# EAGLE board HackmodWear_workingcopy3 (EAGLE 9.1.0)
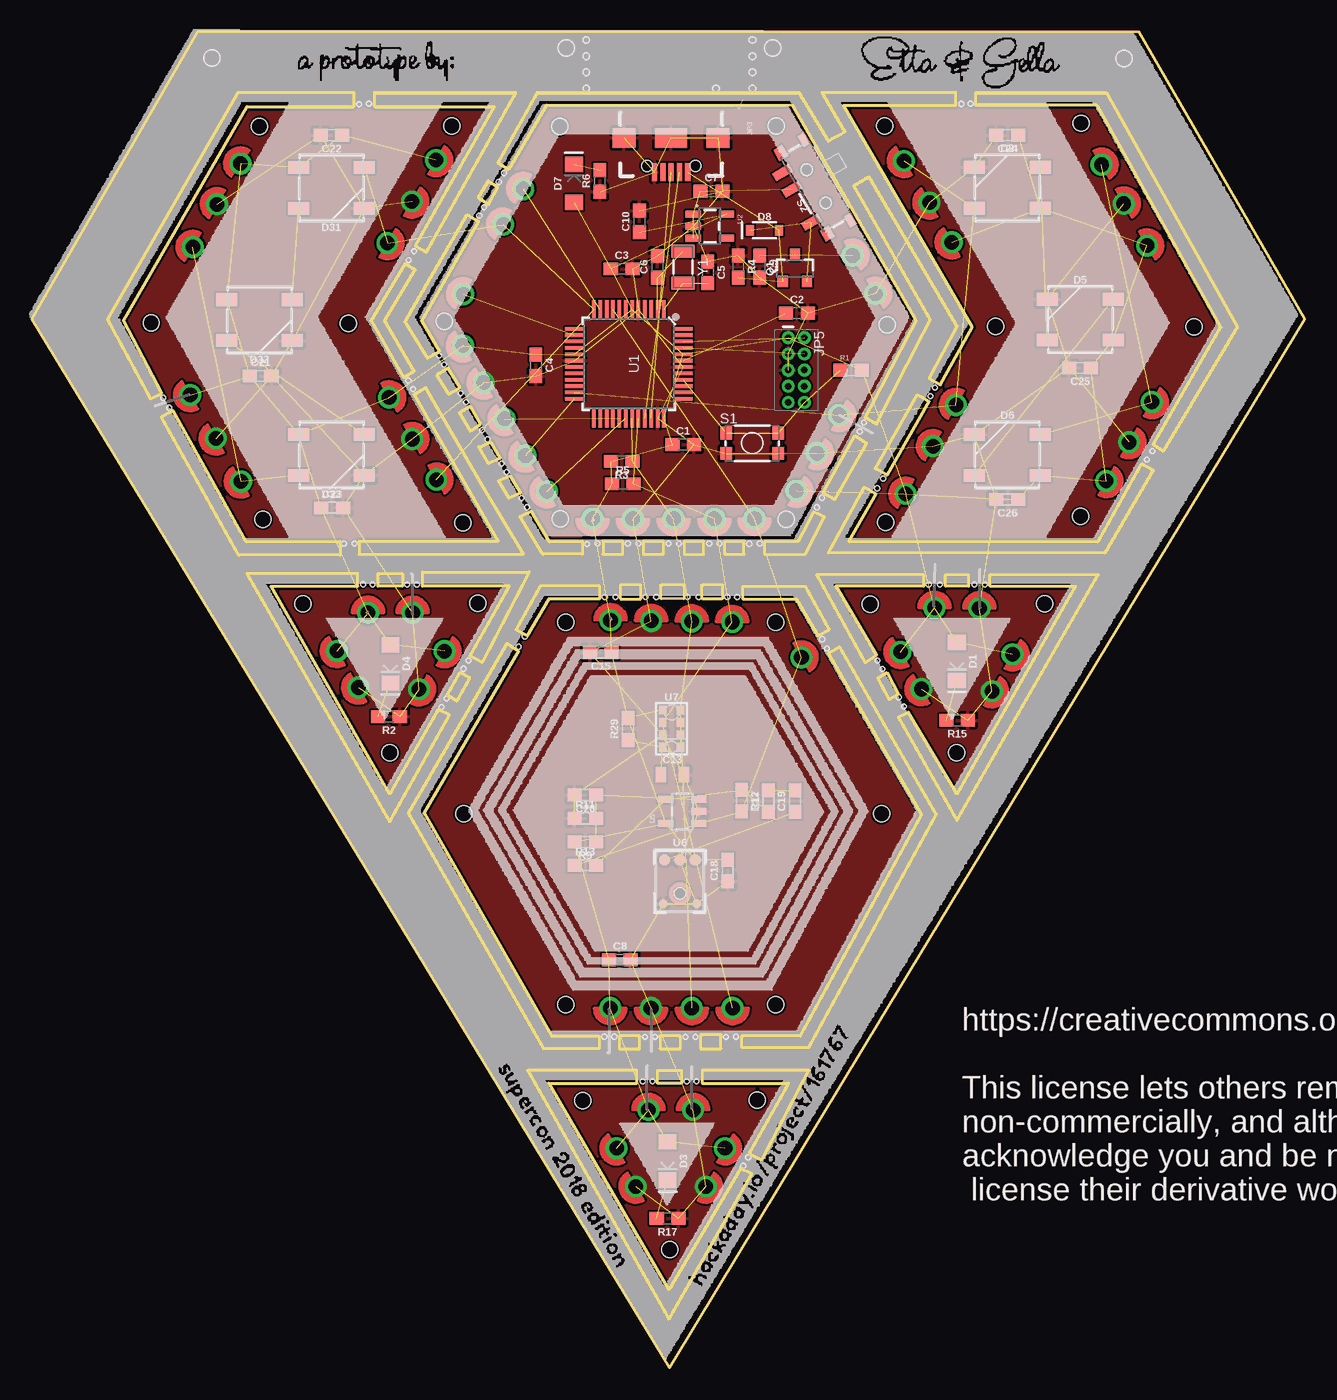
[diagram p0: board, top side]
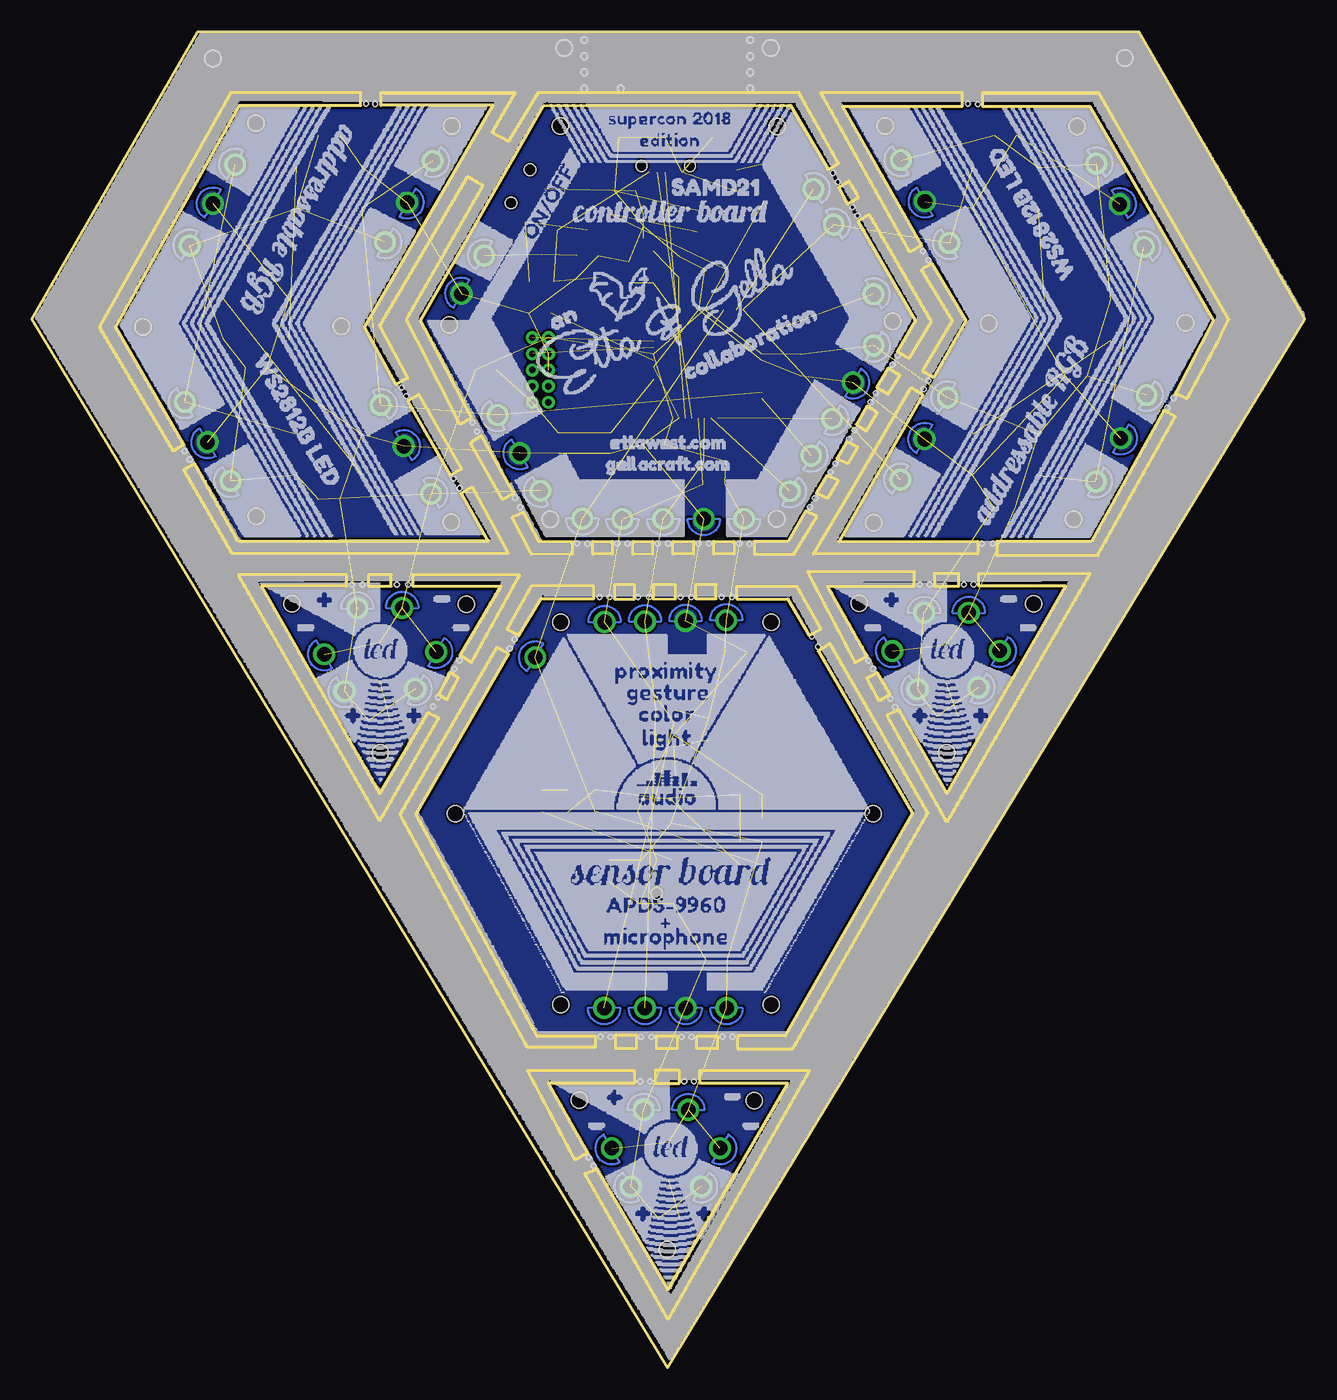
[diagram p1: board, bottom side, seen from below]

Size 99.85 x 104.77 mm. Coordinates in mm from the lower left corner, seen from the top.
Outline: 13.02,104.78 86.84,104.78 99.85,82.23 50.01,0 0,82.23 13.02,104.78
Outline: 16.86,98.91 25.26,98.91 25.26,100.01 16.16,100.01 5.96,82.21 6.17,81.81 6.61,80.96 9.27,76.01 10.17,76.41 7.17,82.11 16.86,98.91
Outline: 26.86,98.91 26.86,100.01 37.97,100.01 30.96,87.51 30.06,88.01 36.27,98.91 26.86,98.91
Outline: 29.26,86.61 30.06,86.11 27.66,82.11 29.98,78.17 29.15,77.67 26.6,82.11 29.26,86.61
Outline: 29.96,76.31 30.89,76.86 35.59,68.76 38.57,63.81 25.66,63.81 25.66,64.81 36.57,64.81 29.96,76.31
Outline: 24.16,64.81 24.16,63.73 16.23,63.73 10.14,74.59 11.06,75.09 16.76,64.81 24.16,64.81
Outline: 37.38,93.97 36.58,94.47 39.66,100.01 60.16,100.01 62.47,96.21 63.77,96.91 61.97,100.01 72.46,100.01 72.46,99.01 63.66,99.01 73.77,81.61 71.27,77.11 70.36,77.61 72.56,81.71 65.66,93.41 64.46,92.71 70.46,82.21 66.27,74.01 65.36,74.51 69.36,82.11 59.71,98.99 40.37,99.01 37.38,93.97
Outline: 35.84,91.26 36.57,92.59 35.77,93.08 35.02,91.79 35.84,91.26
Outline: 35.05,89.93 30.56,82.11 31.96,79.71 31.26,79.31 31.04,79.18 29.29,82.05 34.16,90.43 35.05,89.93
Outline: 32.66,78.41 31.76,77.84 32.7,76.36 33.58,76.89 32.66,78.41
Outline: 34.37,75.41 35.19,73.98 34.41,73.46 33.54,74.91 34.37,75.41
Outline: 35.97,72.61 36.72,71.32 35.82,70.92 35.07,72.21 35.97,72.61
Outline: 37.5,69.97 38.32,68.6 37.41,68.2 36.59,69.57 37.5,69.97
Outline: 39.16,67.2 40.57,64.81 43.18,64.81 43.18,63.81 40.07,63.81 38.27,66.77 39.16,67.2
Outline: 44.79,64.81 44.79,63.81 46.36,63.81 46.36,64.81 44.79,64.81
Outline: 47.95,64.81 47.95,63.81 49.55,63.81 49.55,64.81 47.95,64.81
Outline: 51.16,64.81 51.16,63.81 52.7,63.8 52.7,64.8 51.16,64.81
Outline: 54.34,64.81 54.34,63.81 55.88,63.81 55.88,64.81 54.34,64.81
Outline: 57.47,64.79 57.47,63.79 60.66,63.81 62.18,66.73 61.32,67.13 60.11,64.81 57.47,64.79
Outline: 62.07,68.61 64.56,73.11 65.46,72.51 62.97,68.11 62.07,68.61
Outline: 70.36,75.81 67.06,70.01 66.16,70.51 69.46,76.31 70.36,75.81
Outline: 66.19,68.56 64.06,64.81 83.66,64.81 87.06,70.91 87.96,70.41 84.16,63.91 62.47,63.91 65.3,69.06 66.19,68.56
Outline: 87.96,72.41 88.77,71.91 94.56,81.61 84.27,100.01 74.06,100.01 74.06,99.01 83.56,99.01 93.27,81.61 87.96,72.41
Outline: 44.57,60.31 40.57,60.31 38.87,57.41 37.97,57.91 39.87,61.31 44.57,61.31 44.57,60.31
Outline: 46.19,60.31 47.77,60.31 47.77,61.41 46.19,61.41 46.19,60.31
Outline: 49.37,60.31 49.37,61.41 51.15,61.42 51.15,60.32 49.37,60.31
Outline: 52.57,60.31 52.57,61.41 54.16,61.41 54.16,60.31 52.57,60.31
Outline: 55.77,60.31 55.77,61.31 60.66,61.31 62.57,57.91 61.66,57.41 59.97,60.31 55.77,60.31
Outline: 25.56,61.31 25.56,62.31 16.86,62.31 28.06,42.81 32.77,51.21 31.86,51.61 28.06,45.01 18.76,61.31 25.56,61.31
Outline: 33.57,54.51 32.57,52.81 33.37,52.31 34.37,54.11 33.57,54.51
Outline: 27.15,61.3 27.15,62.3 29.06,62.31 29.06,61.31 27.15,61.3
Outline: 30.63,61.31 30.64,62.41 39.01,62.41 35.3,55.31 34.37,55.81 37.47,61.31 30.63,61.31
Outline: 62.47,56.01 69.77,43.41 60.27,26.01 55.66,26.01 55.66,25.11 60.97,25.11 70.96,43.41 63.37,56.51 62.47,56.01
Outline: 67.06,54.51 67.96,52.81 67.27,52.41 66.36,54.11 67.06,54.51
Outline: 71.66,61.31 71.66,62.21 73.46,62.21 73.46,61.31 71.66,61.31
Outline: 75.16,61.31 75.16,62.21 83.66,62.21 72.56,42.91 67.96,51.01 68.77,51.41 72.56,45.01 81.86,61.31 75.16,61.31
Outline: 69.96,61.31 69.96,62.21 61.57,62.21 65.36,55.31 66.27,55.91 63.07,61.31 69.96,61.31
Outline: 38.16,56.21 30.76,43.51 40.77,26.01 44.5,26.01 44.5,25.01 40.16,25.01 29.56,43.51 37.27,56.81 38.16,56.21
Outline: 46.07,26.01 46.07,25.01 47.66,25.01 47.66,26.01 46.07,26.01
Outline: 49.27,26.01 49.27,25.01 50.87,25.01 50.87,26.01 49.27,26.01
Outline: 52.47,26.11 52.47,25.01 54.07,25.01 54.07,26.11 52.47,26.11
Outline: 49.07,22.31 49.07,23.31 50.97,23.31 50.97,22.31 49.07,22.31
Outline: 52.57,22.31 59.37,22.31 56.27,16.81 57.27,16.31 60.97,23.31 52.57,23.31 52.57,22.31
Outline: 47.47,22.31 47.47,23.31 38.87,23.31 49.97,3.81 56.47,15.21 55.57,15.61 49.97,6.11 40.57,22.31 47.47,22.31
Copper layers (1*16): Top 0.035mm / dielectric 1.5mm / Bottom 0.035mm
Design rules "SparkFun-2-layer-TIGHT": minimum track width 7mil, minimum drill 15mil, track to track 7mil, track to pad 7mil, pad to pad 7mil, via to via 7mil, smd to smd 7mil, copper to edge 7mil, drill to drill 7mil, minimum pad ring 7mil, minimum via ring 7mil, stop-mask expansion 4mil, vias tented up to drill 25mil, thermal gap 10mil
Holes 1.27 mm at 33.82,66.28 32.93,97.39 41.87,28.46 66.65,43.43 59.18,66.54 21.27,59.91 28.09,48.22 41.91,103.5 58.37,28.46 34.97,59.95 85.66,102.68 66.91,97.38 66.97,66.32 82.3,97.61 41.87,58.46 58.37,58.46 41.45,66.56 32.35,82.06 41.39,97.37 9.36,81.96 17.86,97.37 18.12,66.53 75.59,81.68 82.25,66.77 58.1,103.5 24.81,81.9 14.12,102.72 33.87,43.46 58.39,97.39 67.1,81.81 91.16,81.62 65.76,59.89 72.53,48.23 79.46,59.93 43.21,20.93 50.03,9.24 56.91,20.97
Holes 0.51 mm at 43.5,100.33 43.5,101.6 43.5,102.87 43.5,104.14 56.52,100.33 56.52,101.6 56.52,102.87 56.52,104.14 53.66,100.33
Holes 0.38 mm at 25.66,99.11 26.44,99.13 29.54,86.87 29.97,87.58 29.53,77.42 29.9,76.75 31.94,79.38 32.34,78.68 33.64,76.44 34.06,75.72 35.74,72.82 35.32,73.55 36.83,70.92 37.22,70.24 38.41,68.2 38.83,67.49 43.55,64.61 44.37,64.64 46.74,64.64 47.58,64.64 49.94,64.65 50.76,64.64 53.13,64.64 53.93,64.64 56.27,64.62 57.09,64.63 61.99,57.13 62.37,56.4 55.32,60.45 54.54,60.44 52.31,60.44 51.42,60.44 48.97,60.44 48.14,60.44 45.77,60.46 44.93,60.44 25.98,61.44 25.32,64.63 24.47,64.64 26.74,61.43 29.43,61.43 30.2,61.44 38.66,57.36 38.17,56.55 87.87,71.91 87.46,71.22 70.84,76.86 65.27,74.13 70.47,76.21 66.78,69.74 66.31,68.97 35.09,90.36 35.48,91.02 36.63,93.01 37.03,93.71 64.93,73.42 61.57,67.48 61.96,68.23 34.25,55.47 33.86,54.81 32.52,52.48 32.14,51.82 70.35,61.41 71.23,61.41 73.92,61.41 74.75,61.44 68.39,51.86 67.99,52.58 66.7,54.8 66.32,55.46 47.92,22.46 48.68,22.45 51.37,22.45 52.14,22.46 56.19,16.49 55.8,15.83 55.23,25.96 54.45,25.95 52.07,25.96 51.26,25.96 48.88,25.95 48.1,25.95 45.68,25.97 44.9,25.96 72.92,99.12 73.64,99.13 10.3,76.07 10.78,75.28

## Footprints (pad centres in the part's own frame; a part is rotated, then mirrored left to right if it is on the bottom)
0603 = smd 1.1 x 1: 1 -0.85,0; 2 0.85,0
0805 = smd 0.8 x 1.2: 1 -0.9,0; 2 0.9,0
LED-1206 = smd 1.2 x 1.4: A -1.5,0; C 1.5,0
WS2812B = smd 1.651 x 1: 1 2.577,-1.6; 2 2.577,1.6; 3 -2.577,1.6; 4 -2.577,-1.6
SOD-323 = smd 0.63 x 0.83: A 1.15,0; C -1.15,0
1X01 = drill 1.143: P$1 0,0
USB-AB-MICRO-SMD_V03 = smd 1.4 x 0.4: D+1 2.7,0; D-1 2.7,0.65; GND1 2.7,-1.3; ID1 2.7,-0.65; VBUS1 2.7,1.3 | smd 1.5 x 1.8: SHIELD1 0,3.68; SHIELD3 0,-3.68 | smd 1.5 x 2.5: SHIELD2 0,0 | hole 0.85: 2.2,1.9; 2.2,-1.9
2X5-PTH-1.27MM = drill 0.508 pad 1: 1 -2.54,-0.635; 2 -2.54,0.635; 3 -1.27,-0.635; 4 -1.27,0.635; 5 0,-0.635; 6 0,0.635; 7 1.27,-0.635; 8 1.27,0.635; 9 2.54,-0.635; 10 2.54,0.635
SOT23-3 = smd 0.8 x 0.9: 1 -0.95,-1; 2 0.95,-1; 3 0,1.1
0603-RES@1 = smd 1.1 x 1: 1 -0.85,0; 2 0.85,0
TACTILE_SWITCH_SMD_4.6X2.8MM = smd 0.9 x 1: 1 -2.05,-0.8; 2 2.05,-0.8; 3 2.05,0.8; 4 -2.05,0.8
SWITCH_SPST_SMD_A = smd 0.7 x 1.5: 1 -2.25,-1.75; 2 -0.75,-1.75; 3 2.25,-1.75 | smd 1 x 0.6: GND1 -3.65,1; GND3 3.65,1 | smd 1 x 0.8: GND2 -3.65,-1.1; GND4 3.65,-1.1 | hole 0.9: -1.5,0; 1.5,0
TQFP-48 = smd 1.5 x 0.28: 1 -4.25,2.75; 2 -4.25,2.25; 3 -4.25,1.75; 4 -4.25,1.25; 5 -4.25,0.75; 6 -4.25,0.25; 7 -4.25,-0.25; 8 -4.25,-0.75; 9 -4.25,-1.25; 10 -4.25,-1.75; 11 -4.25,-2.25; 12 -4.25,-2.75; 25 4.25,-2.75; 26 4.25,-2.25; 27 4.25,-1.75; 28 4.25,-1.25; 29 4.25,-0.75; 30 4.25,-0.25; 31 4.25,0.25; 32 4.25,0.75; 33 4.25,1.25; 34 4.25,1.75; 35 4.25,2.25; 36 4.25,2.75 | smd 0.28 x 1.5: 13 -2.75,-4.25; 14 -2.25,-4.25; 15 -1.75,-4.25; 16 -1.25,-4.25; 17 -0.75,-4.25; 18 -0.25,-4.25; 19 0.25,-4.25; 20 0.75,-4.25; 21 1.25,-4.25; 22 1.75,-4.25; 23 2.25,-4.25; 24 2.75,-4.25; 37 2.75,4.25; 38 2.25,4.25; 39 1.75,4.25; 40 1.25,4.25; 41 0.75,4.25; 42 0.25,4.25; 43 -0.25,4.25; 44 -0.75,4.25; 45 -1.25,4.25; 46 -1.75,4.25; 47 -2.25,4.25; 48 -2.75,4.25
SOT23-5 = smd 0.55 x 1.2: 1 -0.95,-1.3; 2 0,-1.3; 3 0.95,-1.3; 4 0.95,1.3; 5 -0.95,1.3
ADMP401 = smd 0.9 x 0.9: 1 -1.2,2.62; 5 1.2,2.62; 6 0,2.62 | smd 0.7 x 0.7: 2 1.3,-0.8; 4 -1.3,-0.8 | hole 0.9: 0,0
APDS-9960 = smd 0.6 x 0.72: 1 0.7,1.455; 2 0.7,0.485; 3 0.7,-0.485; 4 0.7,-1.455; 5 -0.7,-1.455; 6 -0.7,-0.485; 7 -0.7,0.485; 8 -0.7,1.455
CRYSTAL-SMD-3.2X1.5MM = smd 1 x 1.8: P$1 -1.25,0; P$2 1.25,0

## Placement (x,y rotation side)
C1  0.1uF  [0603]  51.08,72.41 0 top
C2  0.1uF  [0603]  60.01,82.71 0 top
C3  0.1uF  [0603]  46.26,86.18 0 top
C4  0.1uF  [0603]  39.53,78.61 270 top
C5  15pF  [0603]  53.02,85.92 270 top
C6  15pF  [0603]  49.07,86.33 90 top
C7  0.1uF  [0603]  53.3,92.27 0 top
C8  0.1uF  [0603]  46.12,31.99 0 top
C9  10uF  [0603]  57.09,86.36 270 top
C10  10uF  [0603]  47.66,89.9 90 top
C13  10uF  [0805]  50.23,46.5 0 top
C15  1.0uF  [0603]  44.63,56.09 180 top
C17  100pF  [0603]  55.69,44.46 270 top
C18  0.1uF  [0603]  54.59,38.97 90 top
C19  4.7uF  [0603]  59.87,44.42 90 top
C20  1.0uF  [0603]  43.41,44.91 180 top
C21  0.1uF  [0603]  17.94,77.79 0 top
C22  0.1uF  [0603]  23.49,96.68 180 top
C23  0.1uF  [0603]  23.55,67.45 0 top
C24  0.1uF  [0603]  76.52,96.68 180 top
C25  0.1uF  [0603]  82.23,78.42 180 top
C26  0.1uF  [0603]  76.52,68.1 180 top
D1  [LED-1206]  72.56,55.4 270 top
D2  WS2812B  [WS2812B]  76.52,92.55 0 top
D3  [LED-1206]  49.87,16.21 270 top
D4  [LED-1206]  28.11,55.21 270 top
D5  WS2812B  [WS2812B]  82.24,82.22 0 top
D6  WS2812B  [WS2812B]  76.52,71.6 0 top
D7  [LED-1206]  42.52,92.89 90 top
D8  1A/23V/620mV  [SOD-323]  57.47,89.21 0 top
D31  WS2812B  [WS2812B]  23.5,92.53 180 top
D32  WS2812B  [WS2812B]  17.85,82.17 180 top
D33  WS2812B  [WS2812B]  23.49,71.6 180 top
J3  [1X01]  38.72,71.54 120 top
J4  [1X01]  29.86,59.21 0 top
J5  [1X01]  40.4,68.74 120 top
J6  [1X01]  35.45,77.27 120 top
J7  [1X01]  68.54,68.54 60 top
J8  [1X01]  38.55,92.45 60 top
J9  [1X01]  36.96,89.65 60 top
J10  [1X01]  56.68,66.59 180 top
J11  [1X01]  47.15,66.57 180 top
J12  [1X01]  50.34,66.58 180 top
J13  [1X01]  54.97,28.21 180 top
J14  [1X01]  63.32,74.71 243 top
J15  [1X01]  54.93,58.48 0 top
J16  [1X01]  51.76,58.53 0 top
J17  [1X01]  45.39,58.62 0 top
J18  [1X01]  37.08,74.42 120 top
J19  [1X01]  48.58,58.57 0 top
J20  [1X01]  26.36,59.21 0 top
J21  [1X01]  25.61,53.35 120 top
J23  [1X01]  33.84,84.19 60 top
J25  [1X01]  31.7,94.72 240 top
J26  [1X01]  31.72,69.65 300 top
J27  [1X01]  14.53,91.26 60 top
J28  [1X01]  45.37,28.21 180 top
J29  [1X01]  48.57,28.21 180 top
J32  [1X01]  27.89,88.21 240 top
J33  [1X01]  29.83,72.83 300 top
J34  [1X01]  28.02,76.1 300 top
J36  [1X01]  32.37,56.21 240 top
J37  [1X01]  60.37,55.71 300 top
J38  [1X01]  53.54,66.57 180 top
J39  [1X01]  51.77,28.21 180 top
J41  [1X01]  16.41,69.51 120 top
J42  [1X01]  72.49,75.5 60 top
J43  [1X01]  29.81,91.47 240 top
J44  [1X01]  16.36,94.44 55 top
J45  [1X01]  12.42,76.3 120 top
J46  [1X01]  14.44,72.89 120 top
J47  [1X01]  72.16,88.27 120 top
J48  [1X01]  83.9,94.35 300 top
J49  [1X01]  85.65,91.3 300 top
J50  [1X01]  87.85,75.74 240 top
J51  [1X01]  70.41,91.4 120 top
J52  [1X01]  87.47,88.02 300 top
J53  [1X01]  68.41,94.65 120 top
J54  [1X01]  12.62,87.9 60 top
J55  [1X01]  70.69,72.28 60 top
J56  [1X01]  33.82,80.17 120 top
J57  [1X01]  84.27,69.55 240 top
J58  [1X01]  86.07,72.59 240 top
J59  [1X01]  75.31,53.06 240 top
J60  [1X01]  76.92,55.95 240 top
J61  [1X01]  69.78,53.23 120 top
J62  [1X01]  68.14,56.15 120 top
J63  [1X01]  74.32,59.56 0 top
J64  [1X01]  70.8,59.59 0 top
J65  [1X01]  51.87,20.21 0 top
J66  [1X01]  54.37,17.21 240 top
J67  [1X01]  47.37,14.21 120 top
J68  [1X01]  45.87,17.21 120 top
J69  [1X01]  52.87,14.21 240 top
J70  [1X01]  48.37,20.21 0 top
J71  [1X01]  64.37,87.22 300 top
J72  [1X01]  66.15,84.23 300 top
J73  [1X01]  43.99,66.58 180 top
J74  [1X01]  30.36,53.21 240 top
J75  [1X01]  61.58,71.73 240 top
J76  [1X01]  59.96,68.78 240 top
J77  [1X01]  23.94,56.22 120 top
JP3  [USB-AB-MICRO-SMD_V03]  50.15,96.46 270 top
JP5  CORTEX_DEBUGPTH  [2X5-PTH-1.27MM]  59.96,78.25 270 top
Q1  ZXMP6A13F  [SOT23-3]  59.85,86.2 0 top
R1  10K  [0603-RES@1]  64.26,78.24 0 top
R2  330  [0603]  28.01,51.06 180 top
R3  4.7k  [0603]  46.27,71.09 180 top
R4  100k  [0603]  55.4,86.36 270 top
R5  4.7k  [0603]  46.36,69.32 0 top
R6  1k  [0603]  44.55,93.08 90 top
R9  10k  [0603]  43.41,41.24 180 top
R11  10k  [0603]  43.41,43.07 0 top
R12  1.5k  [0603]  57.78,44.42 90 top
R13  100k  [0603]  43.41,39.4 0 top
R15  330  [0603]  72.59,50.78 180 top
R17  330  [0603]  49.87,11.71 180 top
R29  0  [0603]  46.76,50.1 90 top
S1  RESET  [TACTILE_SWITCH_SMD_4.6X2.8MM]  56.5,72.51 0 top
S2  [SWITCH_SPST_SMD_A]  61.53,92.67 300 top
U1  ATSAMD21G-A  [TQFP-48]  46.83,78.74 270 top
U2  3.3V  [SOT23-5]  53.18,89.53 270 top
U5  OPA344  [SOT23-5]  51.02,43.62 90 top
U6  ADMP401  [ADMP401]  50.83,37.19 0 top
U7  APDS-9960  [APDS-9960]  50.18,50.12 0 top
U$1  [BOTTOMSILK_NOLABELS_300DPI#PNG]  49.32,51.53 0 bottom
U$2  [TOPSILK_300DPI#01#PNG]  50.05,51.6 0 top
Y1  32.768kHz  [CRYSTAL-SMD-3.2X1.5MM]  51.08,86.32 270 top

## Library data of the parts
C1-C4 C7 C8 C18 C21-C26 = SparkFun-Capacitors; PROD_ID: CAP-00810
C5 C6 = SparkFun-Capacitors; PROD_ID: CAP-07881
C9 C10 = SparkFun-Capacitors; PROD_ID: CAP-11015
C13 = SparkFun-Capacitors; PROD_ID: CAP-11330
C15 C20 = SparkFun-Capacitors; PROD_ID: CAP-00868
C17 = SparkFun-Capacitors; PROD_ID: CAP-07883
C19 = SparkFun-Capacitors; PROD_ID: CAP-08280
D1 D3 D4 D7 = SparkFun-LED
D2 D5 D6 D31-D33 = SparkFun-LED; PROD_ID: DIO-12503
D8 = SparkFun-DiscreteSemi; PROD_ID: DIO-11623
J3-J21 J23 J25-J29 J32-J34 J36-J39 J41-J77 = SparkFun-Connectors
JP3 = SparkFun-Connectors; PROD_ID: CONN-11794
JP5 = samd21-temp
Q1 = SparkFun-DiscreteSemi; PROD_ID: TRANS-08285
R1 R9 R11 = SparkFun-Resistors; PROD_ID: RES-00824
R2 R6 R15 R17 = SparkFun-Resistors; PROD_ID: RES-00818
R3 R5 = SparkFun-Resistors; PROD_ID: RES-07857
R4 R13 = SparkFun-Resistors; PROD_ID: RES-07828
R12 = SparkFun-Resistors; PROD_ID: RES-08306
R29 = SparkFun-Resistors; PROD_ID: RES-08609
S1 = samd21-temp; PROD_ID: SWCH-13065
S2 = SparkFun-Switches; PROD_ID: SWCH-10651; SF_SKU: COM-10860
U1 = samd21-temp; PROD_ID: IC-13064
U2 = SparkFun-PowerIC; PROD_ID: VREG-12457
U5 = SparkFun
U6 = SparkFun-Sensors; PROD_ID: IC-09773
U7 = SparkFun-Sensors; PROD_ID: SEN-12005
U$1 = BottomSilk_noLabels_300dpi#png
U$2 = TopSilk_300dpi#01#png
Y1 = samd21-temp; PROD_ID: XTAL-13062

## Nets
3.3V: C1.1 C3.1 C4.1 C8.1 C10.1 C15.1 C18.2 C21.1 C22.1 C23.1 C24.1 C25.1 C26.1 D1.A D2.1 D3.A D4.A D5.1 D6.1 D7.A D31.1 D32.1 D33.1 J7.P$1 J17.P$1 J20.P$1 J25.P$1 J28.P$1 J34.P$1 J36.P$1 J44.P$1 J45.P$1 J47.P$1 J52.P$1 J56.P$1 J57.P$1 J60.P$1 J62.P$1 J64.P$1 J66.P$1 J68.P$1 J70.P$1 J73.P$1 J76.P$1 J77.P$1 JP5.1 R1.2 R3.2 R5.1 R9.2 R29.2 U1.6 U1.17 U1.36 U1.44 U2.5 U5.5 U6.5 U7.8
!RESET: JP5.10 R1.1 S1.3 S1.4 U1.40
A0: U1.3
A1: U1.7
A2: U1.8
A3: C17.2 J10.P$1 J37.P$1 R13.1 U1.9 U5.1
D0/RXI: U1.16
D1/TXO: U1.15
D2: D2.4 J14.P$1 J42.P$1 J53.P$1 U1.23
D3: J23.P$1 U1.14
D4: U1.13
D5: J3.P$1 U1.24
D6: J18.P$1 U1.29
D7: J5.P$1 U1.30
D8: J8.P$1 U1.11
D9: D31.4 J9.P$1 J26.P$1 J32.P$1 U1.12
D10/SS: U1.27
D11/MOSI: U1.25
D12/MISO: U1.28
D13/SCK: U1.26
DO: D33.2 J41.P$1 J54.P$1
DOUT: D6.2 J48.P$1 J50.P$1
GND: C1.2 C2.2 C3.2 C4.2 C5.1 C6.2 C7.2 C8.2 C9.2 C10.2 C13.2 C15.2 C18.1 C20.2 C21.2 C22.2 C23.2 C24.2 C25.2 C26.2 D2.3 D5.3 D6.3 D31.3 D32.3 D33.3 J4.P$1 J6.P$1 J11.P$1 J19.P$1 J21.P$1 J27.P$1 J29.P$1 J33.P$1 J43.P$1 J46.P$1 J49.P$1 J51.P$1 J55.P$1 J58.P$1 J59.P$1 J61.P$1 J63.P$1 J65.P$1 J67.P$1 J69.P$1 J72.P$1 J74.P$1 J75.P$1 JP3.GND1 JP3.SHIELD1 JP3.SHIELD2 JP3.SHIELD3 JP5.3 JP5.5 R2.1 R4.1 R6.1 R11.1 R15.1 R17.1 S1.1 S1.2 U1.5 U1.18 U1.35 U1.42 U2.2 U5.2 U6.2 U6.4 U6.6 U7.6
ID: JP3.ID1
IN: C7.1 S2.2 U2.1 U2.3
LEDA: C13.1 R29.1 U7.5
N$1: D4.C R2.2
N$2: C5.2 U1.1 Y1.P$2
N$3: C19.1 U6.1
N$4: C6.1 U1.2 Y1.P$1
N$5: U7.3 U7.4
N$6: C17.1 R12.1 R13.2 U5.4
N$7: D7.C R6.2
N$8: D8.C Q1.2 S2.3
N$10: C19.2 R12.2
N$11: C20.1 R9.1 R11.2 U5.3
N$12: D1.C R15.2
N$14: D31.2 D32.4
N$15: D3.C R17.2
N$16: D32.2 D33.4
N$22: D2.2 D5.4
N$23: D5.2 D6.4
SCL: J13.P$1 J15.P$1 J38.P$1 R5.2 U1.32 U7.7
SDA: J12.P$1 J16.P$1 J39.P$1 R3.1 U1.31 U7.1
SWCLK: JP5.4 U1.45
SWDIO: JP5.2 U1.46
USB_D+: JP3.D+1 U1.34
USB_D-: JP3.D-1 U1.33
VBUS: D8.A JP3.VBUS1 Q1.1 R4.2
VDDCORE: C2.1 U1.43
VIN: C9.1 J71.P$1 Q1.3

## Tracks (layer width: path | path; a pad name or v marks a point on that pad's centre or on a via)
3.3V  (58 unrouted)
!RESET  (4 unrouted)
A3  (5 unrouted)
D2  (4 unrouted)
D3  (1 unrouted)
D5  (1 unrouted)
D6  (1 unrouted)
D7  (1 unrouted)
D8  (1 unrouted)
D9  (4 unrouted)
DO  (2 unrouted)
DOUT  (2 unrouted)
GND  (72 unrouted)
  pour Top: 13.02,104.77 86.84,104.77 99.85,82.23 50.01,0 0,82.23
  pour Bottom: 0.16,82.23 13.02,104.77 86.68,104.77 86.84,104.77 99.85,82.23 50.01,0
IN  (3 unrouted)
LEDA  (2 unrouted)
N$1  (1 unrouted)
N$2  (2 unrouted)
N$3  (1 unrouted)
N$4  (2 unrouted)
N$5  (1 unrouted)
N$6  (3 unrouted)
N$7  (1 unrouted)
N$8  (2 unrouted)
N$10  (1 unrouted)
N$11  (3 unrouted)
N$12  (1 unrouted)
N$14  (1 unrouted)
N$15  (1 unrouted)
N$16  (1 unrouted)
N$22  (1 unrouted)
N$23  (1 unrouted)
SCL  (5 unrouted)
SDA  (5 unrouted)
SWCLK  (1 unrouted)
SWDIO  (1 unrouted)
USB_D+  (1 unrouted)
USB_D-  (1 unrouted)
VBUS  (3 unrouted)
VDDCORE  (1 unrouted)
VIN  (2 unrouted)

## Text on the board
tPlace: https://creativecommons.org/licenses/by-nc-sa/4.0/legalcode / / This license lets others remix, tweak, and build upon your work / non-commercially, and although their new works must also / acknowledge you and be non-commercial, they don’t have to / license their derivative works on the same terms.